# Altium PCB PCB2.PcbDoc
Units mil, origin at the board's own origin, x right, y up, seen from the top; angles counter-clockwise.
Board outline 725 x 620 mil, 2 copper layers (Top Layer, Bottom Layer); 2 components, 2 nets, 4 pads, 0 vias.
Unrouted connection lines stored in the file: 1.
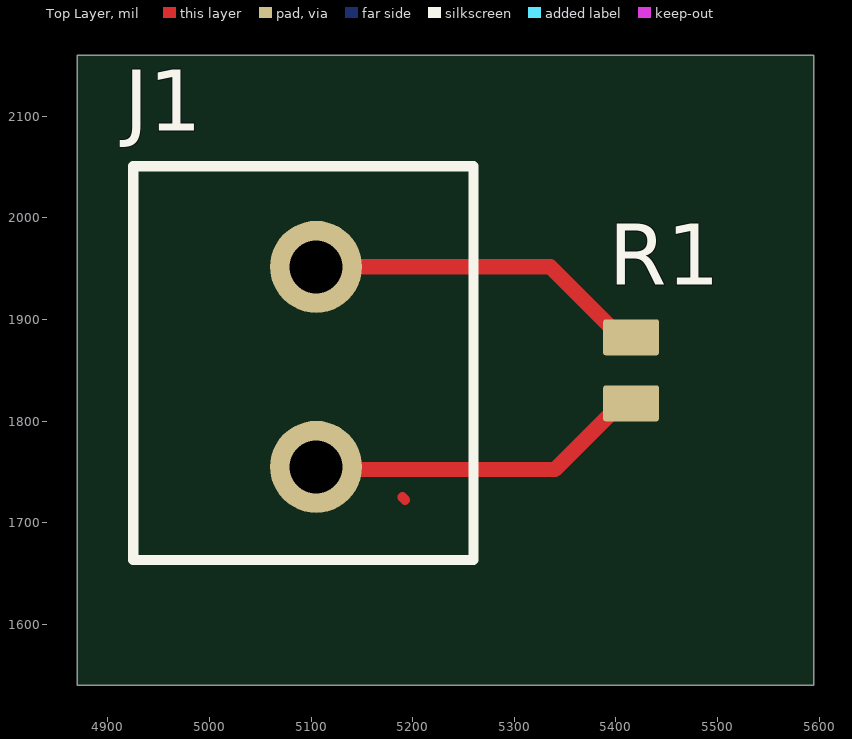
[diagram p0: Top Layer view]
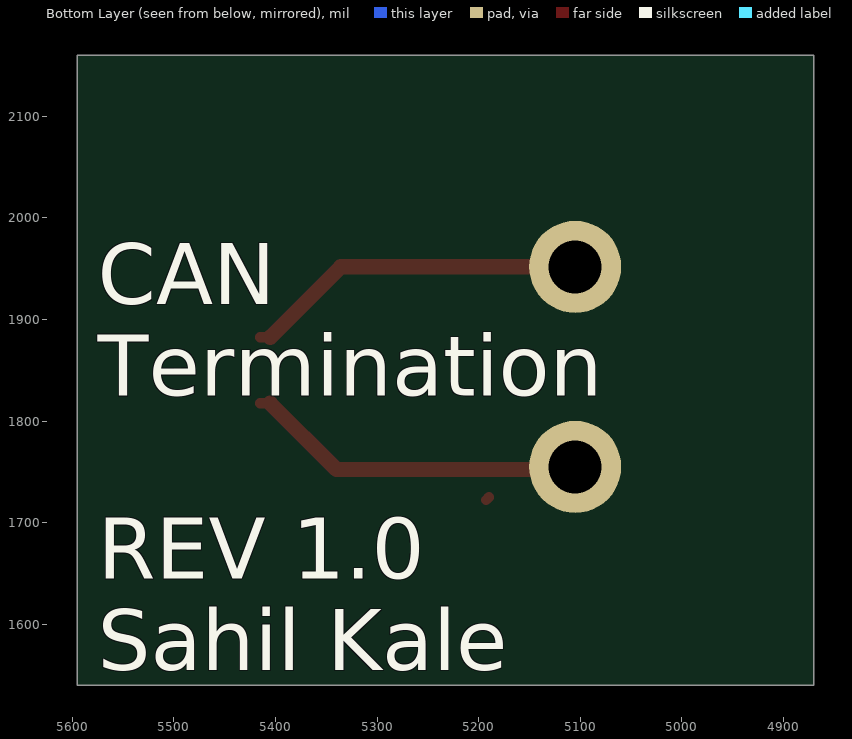
[diagram p1: Bottom Layer view, seen from below]

## Layer stack, top to bottom
Top Solder: solder mask 0.4, Solder Resist, Dk 3.5
Top Layer: signal copper 1.4
Dielectric 1: dielectric 12.6, FR-4, Dk 4.8
Bottom Layer: signal copper 1.4
Bottom Solder: solder mask 0.4, Solder Resist, Dk 3.5

## Board outline
4870,1540 5595,1540 5595,2160 4870,2160

## Design rules (kind name [scope] priority, off if disabled: settings)
Clearance [All] p1: gap=5 ignorepadtopadclearanceinfootprint=FALSE except(9.84: Arc-Hole Track-Hole SMDPad-Hole THPad-Hole Via-Hole Fill-Hole Poly-Hole Region-Hole Text-Hole)
PolygonConnect [All] p1: connectstyle=Relief reliefconductorwidth=10 reliefentries=4 polygonreliefangle="90 Angle" airgapwidth=10
RoomDefinition Sheet1 [InComponentClass('Sheet1')] p1: confinementstyle=ConfineIn formatcopy=TRUE lockcomponents=FALSE outline 0,0 2000,0 2000,1000 0,1000
RoutingVias [All] p1: holewidth=28 width=50 viastyle="Through Hole" minholewidth=28 minwidth=50 maxholewidth=28 maxwidth=50
SolderMaskExpansion [All] p1: expansion=4 istentingtop=FALSE
Width [All] p1: maxlimit=10 minlimit=10 preferedwidth=10
30 further rules are at their usual default settings.

## Components (designator, comment, footprint, x,y, rotation, side; value= is the part's Value field where it differs from the comment)
J1 "CON_2M_TERM" 1935161 5105,1853.43 r270 top
R1 "RES_120Ω_0805_1%" RESC0805 5415,1850 r90 top

## Footprints (in the part's own frame and the unit in brackets; to place one, negate y for a bottom-side part, rotate by r counter-clockwise, add the part's x,y. Pads: shape width x height; smd on the part's side, far side on the other; paste and mask are expansions set on the pad)
1935161 [mm] "TERM BLK 2POS SIDE ENTRY 5MM PCB"
  round 2.3 hole 1.325: 1(-2.5,0) 2(2.5,0)
  silkscreen extent -5.01,-4.57 4.83,3.94, body extent -5.01,-5.06 5.39,3.94, height 11.41
RESC0805 [mm] "Chip Resistor, 2-Leads, Body 2.00x1.25mm, IPC High Density"
  rrect15% 0.9x1.4 smd: 1(-0.825,0) 2(0.825,0)
  body extent -1,-0.62 1,0.63, height 0.61

## Part data
J1: "TERM BLK 2POS SIDE ENTRY 5MM", Current=18A, Manufacturer 1="Phoenix Contact", Manufacturer Part Number 1=1935161, Max Current Rating=16A, Package/Footprint=SMD, Supplier Part Number 1=277-1667-ND, Voltage=300V, Mounting Type=TH, Supplier 1=Digi-Key
R1: "RES 120 OHM 1% 1/8W 0805", LCSC Part #=C17437, Manufacturer 1=Vishay, Manufacturer Part Number 1=CRCW0805120RFKEA, Package/Footprint=0805, Resistance=120Ω, Supplier Part Number 1=541-120CCT-ND, Mounting Type=SMD, Supplier 1=Digi-Key

## Nets (pads, with @x,y where several pads share a name; then routed paths per layer and width w, separated by ;. In a path a pad name is that pad's centre, name@x,y a point inside that pad or via, vN(x,y) a via of type N, cw(c..) or ccw(c..) an arc to the next point about the centre after c; other vN are vias at no path point)
NetJ1_1: J1.1 R1.2 | length 338.7
  Top Layer w10: R1.2@5405.16,1882.48 R1.2
  Top Layer w15: J1.1 5335.79,1951.85 R1.2@5405.16,1882.48
NetJ1_2: J1.2 R1.1 | length 338.1
  Top Layer w10: 5190,1725 5192.64,1722.36 ; R1.1@5405.16,1817.52 R1.1
  Top Layer w15: J1.2@5107.64,1752.36 5340,1752.36 R1.1@5405.16,1817.52

## Silkscreen, mask and mechanical layers (free items; w line width, h text height)
Bottom Overlay:
  text "CAN  / Termination  /  / REV 1.0 / Sahil Kale" at 5575,1555 h60